# Altium PCB PCB1_test.PcbDoc
Units mil, origin at the board's own origin, x right, y up, seen from the top; angles counter-clockwise.
Board outline 5106 x 1904 mil, 2 copper layers (Top Layer, Bottom Layer); 59 components, 20 nets, 152 pads, 39 vias.
Unrouted connection lines stored in the file: 3.
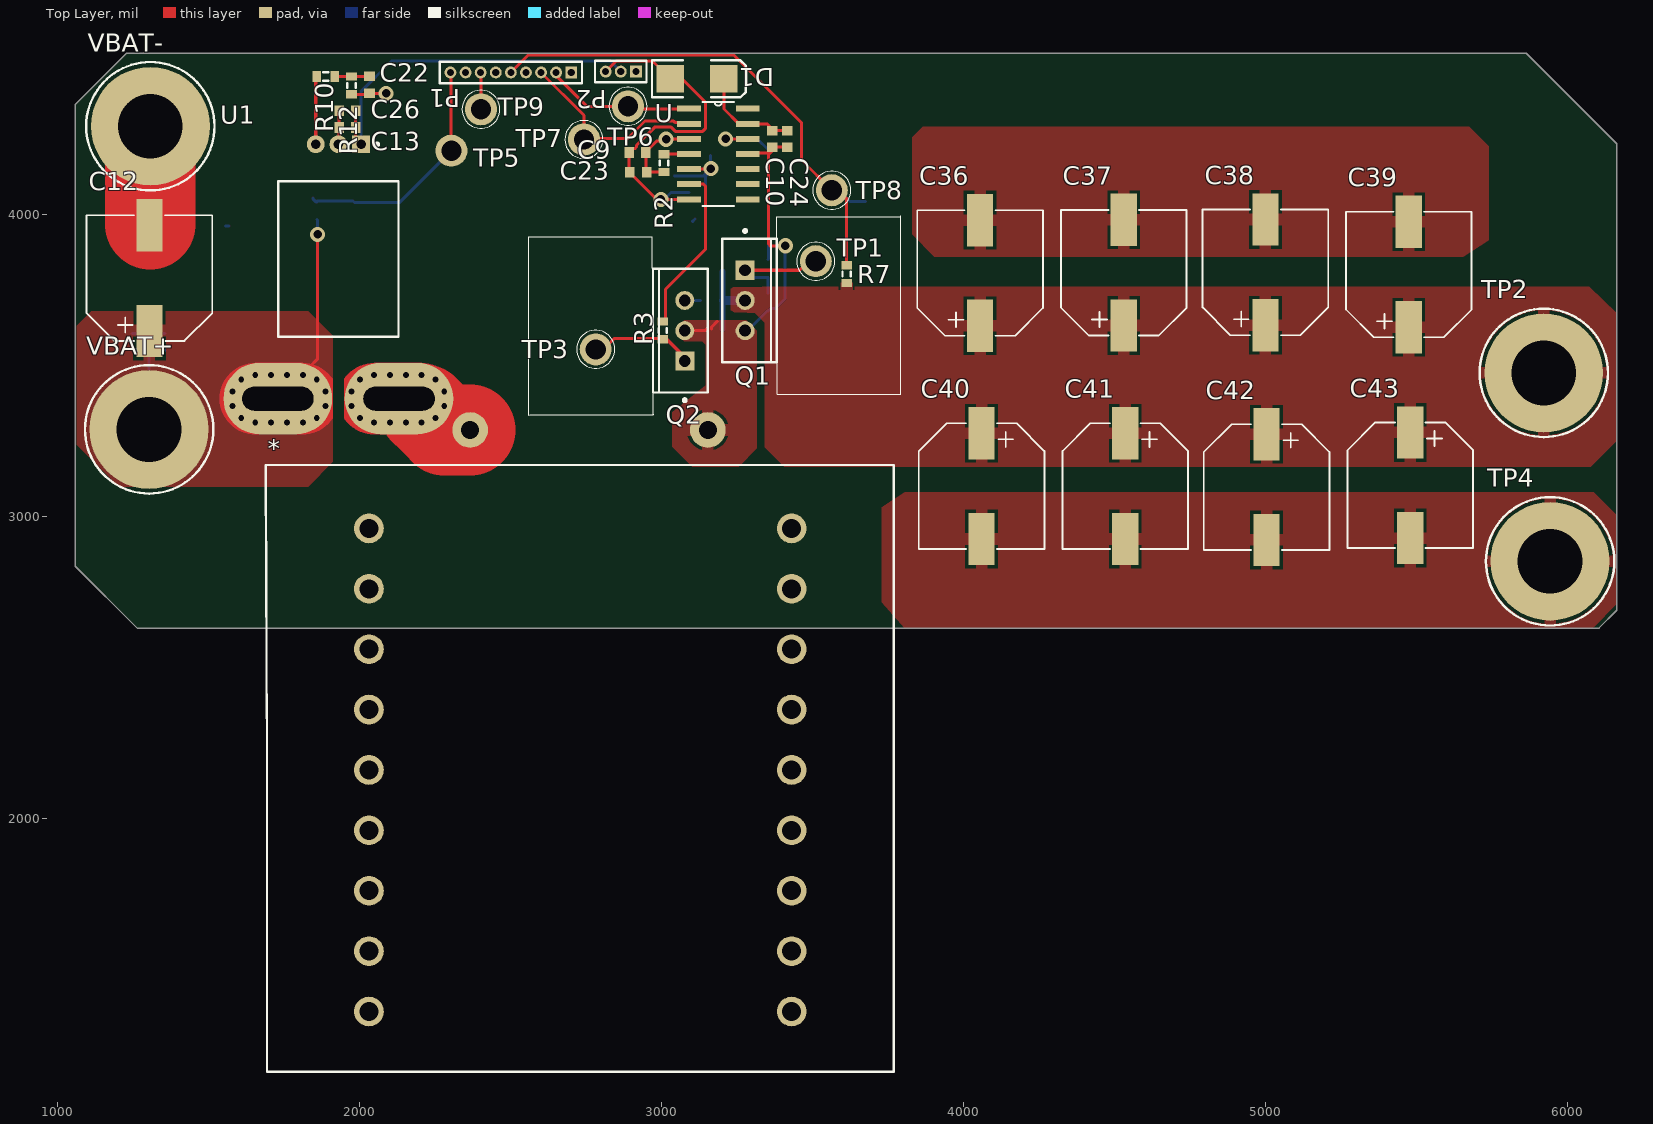
[diagram p0: Top Layer view]
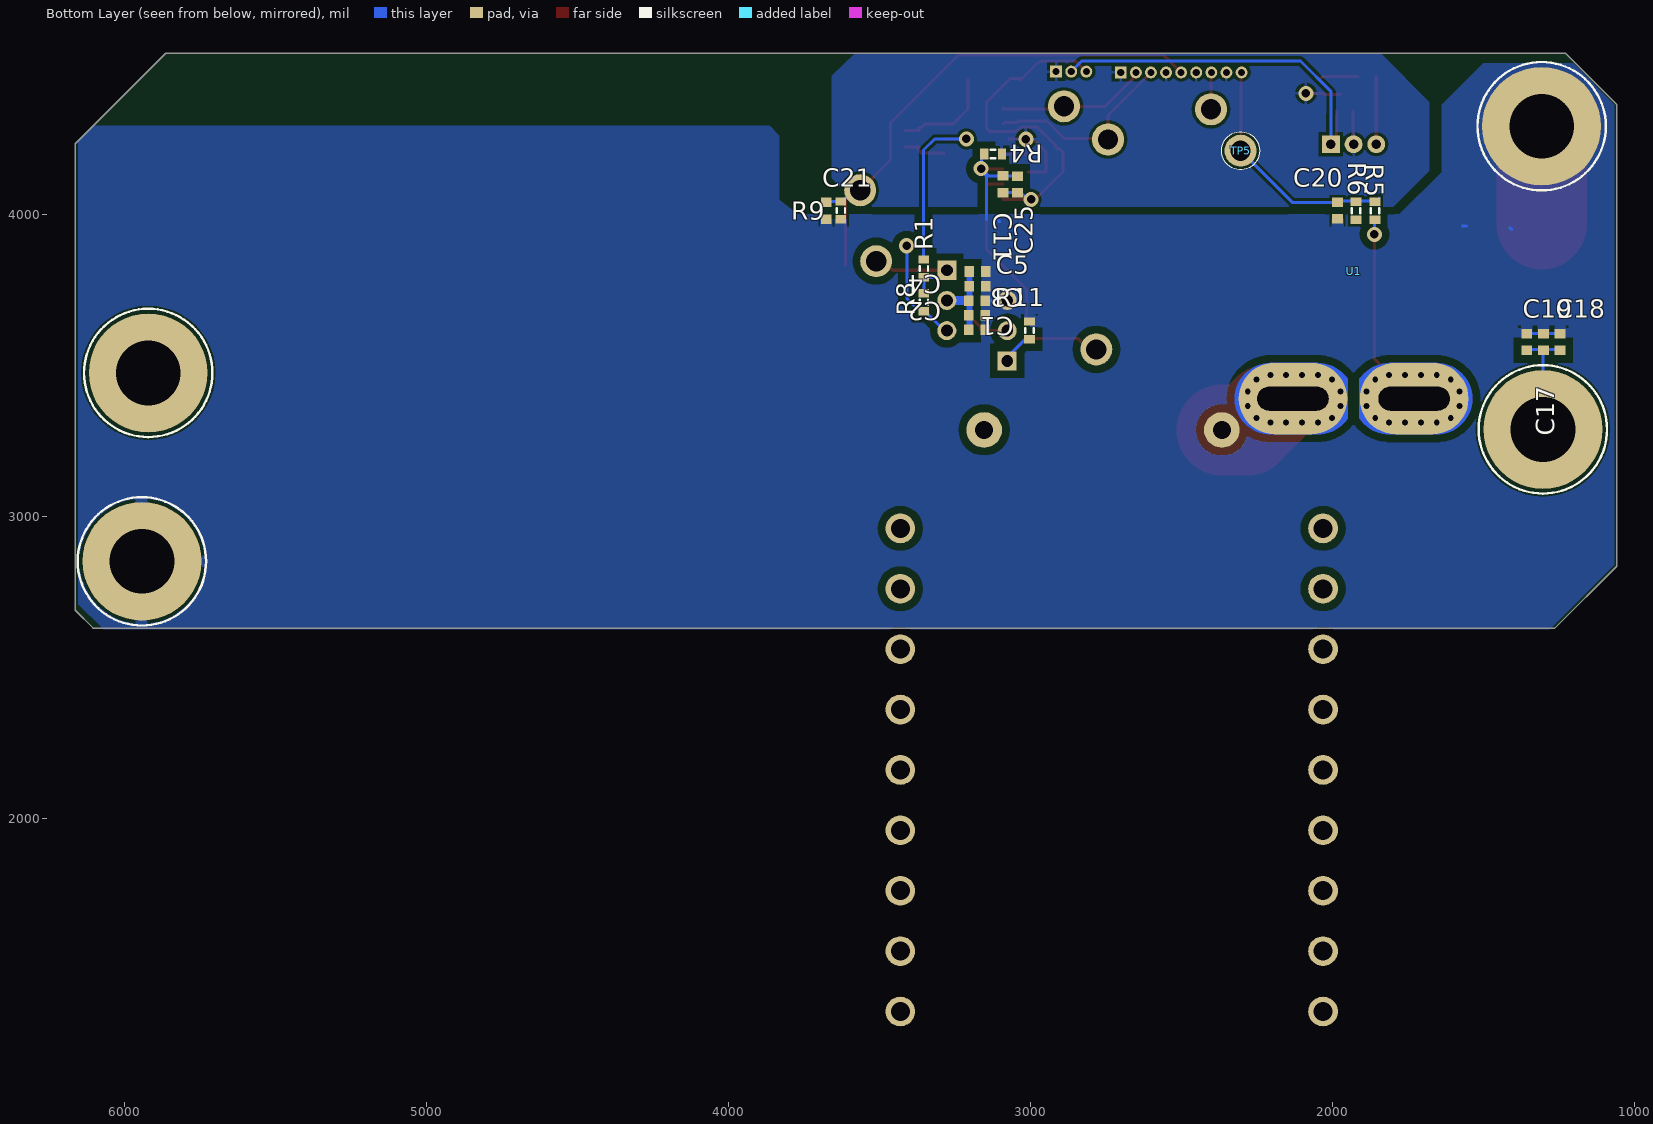
[diagram p1: Bottom Layer view, seen from below]

## Layer stack, top to bottom
Top Solder: solder mask 0.4, Solder Resist, Dk 3.5
Top Layer: signal copper 1.4
Dielectric 1: dielectric 12.6, FR-4, Dk 4.8
Bottom Layer: signal copper 1.4
Bottom Solder: solder mask 0.4, Solder Resist, Dk 3.5

## Board outline
1057,2835 1057,4364 1227,4534 5863,4534 6163,4234 6163,2689 6104,2630 1262,2630

## Design rules (kind name [scope] priority, off if disabled: settings)
Clearance [InNetClass('Boost')] p1: gap=25 ignorepadtopadclearanceinfootprint=TRUE except(0: Arc-Hole Track-Hole SMDPad-Hole THPad-Hole Via-Hole Fill-Hole Poly-Hole Region-Hole Text-Hole; 10: Text-Text)
Clearance dgndClearance [InNetClass('Control')] p2: gap=10 ignorepadtopadclearanceinfootprint=TRUE except(0: Arc-Hole Track-Hole SMDPad-Hole THPad-Hole Via-Hole Fill-Hole Poly-Hole Region-Hole Text-Hole)
Creepage [InNetClass('Boost')] p1: checkdistance=25
Height [All] p1: minheight=0 maxheight=99999 prefheight=500
PolygonConnect PolygonConnect_1 [InNetClass('Boost')] p1: connectstyle=Relief reliefconductorwidth=40 reliefentries=4 polygonreliefangle="90 Angle" airgapwidth=10
PolygonConnect [All] p2: connectstyle=Relief reliefconductorwidth=10 reliefentries=4 polygonreliefangle="90 Angle" airgapwidth=10
RoutingVias [All] p1: holewidth=28 width=50 viastyle="Through Hole" minholewidth=28 minwidth=50 maxholewidth=28 maxwidth=50
SolderMaskExpansion [All] p1: expansion=4 istentingtop=FALSE
Width [InNetClass('Boost')] p1: maxlimit=500 minlimit=10 preferedwidth=300 minimp=50.000000 maximp=50.000000 favimp=50.000000
29 further rules are at their usual default settings.

## Classes and differential pairs
component class decoupling: C1 C2 C3 C4 C5 C36 C37 C38 C39 C40 C41 C42 C43
net class Control: +5 +15 DGND G_HO G_LO HIN Isense IsenseFiltered LIN NetC10_2 NetR1_2 NetR2_2 NetR3_2 NetU_8 NetU_9 NetU_10 NetU_14 PGND Vbat VbatFiltered Vout VoutFiltered Vs
net class Boost: G_HO G_LO Net*_1 PGND Vbat Vout Vs
component class SignalFilters: C20 C21 C22 P1 R5 R6 R7 R9 R10 R12 TP5 TP6 TP7 TP8 TP9
component class Sheet1: * C9 C10 C11 C12 C13 C17 C18 C19 C23 C24 C25 C26 D1 P2 Q1 Q2 R1 R2 R3 R4 R8 R11 TP1 TP2 TP3 TP4 U U1 VBAT+ VBAT-

## Components (designator, comment, footprint, x,y, rotation, side; value= is the part's Value field where it differs from the comment)
* "ETD44_inductor" ETD44 2730,2160 r0 top
C1 "Cap" C0603 3176,3618 r0 bottom value=0.1uF
C2 "Cap" C0603 3176,3666 r0 bottom value=0.1uF
C3 "Cap" C0603 3176,3714 r0 bottom value=0.1uF
C4 "Cap" C0603 3175,3762 r0 bottom value=0.1uF
C5 "Cap" C0603 3174,3811 r0 bottom value=0.1uF
C9 "Cap" C0603 2919.56,4205 r180 top value=1uF
C10 "Cap" C0603 3366,4250 r90 top value=1uF
C11 "Cap" C0603 3090,4100 r270 bottom value=1uF
C12 "47uF" CAP_PC_10X10 1303,3789 r90 top value=Value
C13 "Cap" C0603 1958.44,4288 r0 top value=1uF
C17 "Cap" C0603 1300,3577.56 r270 bottom value=0.1uF
C18 "Cap" C0603 1245,3577.56 r270 bottom value=1uF
C19 "Cap" C0603 1355,3577.56 r270 bottom value=10uF
C20 "Cap" C0603 1982,4012.56 r90 bottom value=33nF
C21 "Cap" C0603 3675,4012 r90 bottom value=33nF
C22 "Cap" C0603 2032,4429.56 r90 top value=2.2nF
C23 "Cap" C0603 2922,4140 r0 top value=0.1uF
C24 "Cap" C0603 3415,4250 r270 top value=0.1uF
C25 "Cap" C0603 3042,4099 r90 bottom value=0.1uF
C26 "Cap" C0603 1958.44,4343 r0 top value=0.1uF
C36 "47uF" CAP_PC_10X10 4054,3806 r90 top value=Value
C37 "47uF" CAP_PC_10X10 4530,3807 r90 top value=Value
C38 "47uF" CAP_PC_10X10 4999,3808 r90 top value=Value
C39 "47uF" CAP_PC_10X10 5474,3801 r90 top value=Value
C40 "47uF" CAP_PC_10X10 4059,3100 r270 top value=Value
C41 "47uF" CAP_PC_10X10 4535,3100 r270 top value=Value
C42 "47uF" CAP_PC_10X10 5003,3097 r270 top value=Value
C43 "47uF" CAP_PC_10X10 5479,3103 r270 top value=Value
D1 "D Schottky" SMB 3117,4449 r0 top
P1 "MHDR1X9" MHDR1X9 2700,4470 r180 top
P2 "MHDR1X3" MHDR1X3 2914,4473 r180 top
Q1 "IPP076N12N3 G" INF-PG-TO220-3-1_A_V 3276,3715 r0 top
Q2 "IPP076N12N3 G" INF-PG-TO220-3-1_A_V 3076,3615 r180 top
R1 "Res3" J1-0603 3352,3821 r90 bottom value=10
R2 "Res3" J1-0603 3007,4170 r90 top value=0
R3 "Res3" J1-0603 3003,3616 r90 top value=10
R4 "Res3" J1-0603 3123,4200 r180 bottom value=0
R5 "Res3" J1-0603 1858,4012 r270 bottom value=22k
R6 "Res3" J1-0603 1921,4012 r90 bottom value=1k
R7 "Res3" J1-0603 3612,3802.53 r270 top value=22k
R8 "Res3" J1-0603 3352,3709 r90 bottom value=10k
R9 "Res3" J1-0603 3627,4013 r90 bottom value=1k
R10 "Res3" J1-0603 1887,4457 r180 top value=22k
R11 "Res3" J1-0603 3002,3616 r270 bottom value=10k
R12 "Res3" J1-0603 1972,4427 r270 top value=33k
TP1 "Test Point" "TEST POINT - TH" 3510,3845 r0 top
TP2 "575-4" KSTN-575-4 5921,3475 r0 top
TP3 "Test Point" "TEST POINT - TH" 2781,3553 r0 top
TP4 "575-4" KSTN-575-4 5942,2851 r0 top
TP5 "Test Point" "TEST POINT - TH" 2303,4211 r0 bottom
TP6 "Test Point" "TEST POINT - TH" 2888,4358 r0 top
TP7 "Test Point" "TEST POINT - TH" 2742,4248 r0 top
TP8 "Test Point" "TEST POINT - TH" 3563,4080 r90 top
TP9 "Test Point" "TEST POINT - TH" 2401,4348 r0 top
U "IR21834STRPBF" SOIC127P600X175-14N 3187,4200 r0 top
U1 "ACS770KCB-150B-PFF-T" ALLEGRO_MICROSYSTEMS_CB-PFF-5_0 1929,3811 r180 top
VBAT+ "575-4" KSTN-575-4 1302,3288 r0 top
VBAT- "575-4" KSTN-575-4 1306,4292 r0 top

## Footprints (in the part's own frame and the unit in brackets; to place one, negate y for a bottom-side part, rotate by r counter-clockwise, add the part's x,y. Pads: shape width x height; smd on the part's side, far side on the other; paste and mask are expansions set on the pad)
ALLEGRO_MICROSYSTEMS_CB-PFF-5_0 [mm]
  rect 1.5x1.5 hole 0.8 paste-1000 mask+0: 1(-1.91,-10.7)
  round 1.5 hole 0.8 paste-1000 mask+0: 2(0,-10.7) 3(1.91,-10.7)
  oval 9.144x6.02 hole 2 slot 5.994 at 0 deg paste-1000 mask+0: 4(5.099,10.7) 5(-5.099,10.7)
  round 5.4 smd far side paste-1000 mask+0: 4(5.099,10.7) 5(-5.099,10.7)
  Top Layer region: -0.5,9.042 -1.581,8.057 -3,7.7 -3,7.7 -7,7.7 -8.302,7.997 -9.345,8.83 -9.925,10.032 -9.925,11.368 -9.345,12.57 -8.302,13.403 -7,13.7 -7,13.7 -3,13.7 -1.581,13.343 -0.5,12.358 -0.5,12.358
  Top Layer region: 0.5,12.358 1.581,13.343 3,13.7 3,13.7 7,13.7 8.302,13.403 9.345,12.57 9.925,11.368 9.925,10.032 9.345,8.83 8.302,7.997 7,7.7 7,7.7 3,7.7 1.581,8.057 0.5,9.042 0.5,9.042
  Bottom Layer region: -0.5,9.042 -1.581,8.057 -3,7.7 -3,7.7 -7,7.7 -8.302,7.997 -9.345,8.83 -9.925,10.032 -9.925,11.368 -9.345,12.57 -8.302,13.403 -7,13.7 -7,13.7 -3,13.7 -1.581,13.343 -0.5,12.358 -0.5,12.358
  Bottom Layer region: 0.5,12.358 1.581,13.343 3,13.7 3,13.7 7,13.7 8.302,13.403 9.345,12.57 9.925,11.368 9.925,10.032 9.345,8.83 8.302,7.997 7,7.7 7,7.7 3,7.7 1.581,8.057 0.5,9.042 0.5,9.042
  silkscreen extent -5.05,-10.82 5.05,5.5, body extent -10.1,-11.55 10.1,13.8, height 0.25
C0603 [mm] "Chip Capacitor, Body 1.6x0.8mm, IPC High Density"
  rect 0.8x0.9 smd: 1(-0.7,0) 2(0.7,0)
  body extent -0.87,-0.48 0.87,0.48, height 1.3
CAP_PC_10X10 [mil]
  rect 173x87 smd paste+0 mask+0: 1(-175,0) 2(175,0)
  silkscreen extent -208,-208 208,208, body extent -228,-207 229,206, height 506
ETD44 [mm]
  round 3 hole 1.5: 1(-9.271,28.6) 2(10.729,28.6)
  round 2.5 hole 1.6: NC(-17.78,-20.32) NC(-17.78,-15.24) NC(-17.78,-10.16) NC(-17.78,-5.08) NC(-17.78,0) NC(-17.78,5.08) NC(-17.78,10.16) NC(-17.78,15.24) NC(-17.78,20.32) NC(17.78,-20.32) NC(17.78,-15.24) NC(17.78,-10.16) NC(17.78,-5.08) NC(17.78,0) NC(17.78,5.08) NC(17.78,10.16) NC(17.78,15.24) NC(17.78,20.32)
  Top Layer lines w0.254: -16.866,-20.396 -16.662,-20.396
  silkscreen extent -26.47,-25.4 26.37,25.65, body extent -25.5,-24.8 25.5,24.8, height 38.11
INF-PG-TO220-3-1_A_V [mm] "FM, 3-Leads, Body 10.03x8.98mm, Pitch 2.54mm"
  rect 1.6x1.6 hole 1: 1(0,2.54)
  round 1.6 hole 1: 2(0,0) 3(0,-2.54)
  silkscreen extent -1.93,-7.9 13.11,7.14, body extent -1.93,-7.85 13.03,7.03, height 23.52
J1-0603 [mm] "Chip Resistor, Body 1.6x0.8mm, IPC High Density"
  rect 0.7x0.9 smd: 1(-0.75,0) 2(0.75,0)
  silkscreen extent -0.2,-0.35 0.2,0.35, body extent -0.85,-0.48 0.85,0.48, height 0.9
KSTN-575-4 [mm] "Banana Jack, Non-Insulated, Dia 7.92mm"
  round 10 hole 5.45: 1(0,0)
  silkscreen extent -5.4,-5.4 5.4,5.4, body extent -3.98,-3.96 3.92,3.94, height 2.36
MHDR1X3 [mm] "Connector; Header; 3 Position"
  rect 1x1 hole 0.6: 1(0,0)
  round 1 hole 0.6: 2(1.27,0) 3(2.54,0)
  silkscreen extent -0.9,-0.9 3.44,0.9
MHDR1X9 [mm] "Connector; Header; 9 Position"
  rect 1x1 hole 0.6: 1(0,0)
  round 1 hole 0.6: 2(1.27,0) 3(2.54,0) 4(3.81,0) 5(5.08,0) 6(6.35,0) 7(7.62,0) 8(8.89,0) 9(10.16,0)
  silkscreen extent -0.9,-0.9 11.06,0.9
SMB [mm] "DO-214-AA/SMB; 2 C-Bend Leads; Body 5.3 x 3.6 mm, inc. leads (LxW)"
  rect 2.3x2.3 smd: 1(-2.25,0) 2(2.25,0)
  silkscreen extent -3.8,-1.55 4.1,1.55
SOIC127P600X175-14N [mil]
  rect 78x20 smd: 1(-97,150) 2(-97,100) 3(-97,50) 4(-97,0) 5(-97,-50) 6(-97,-100) 7(-97,-150) 8(97,-150) 9(97,-100) 10(97,-50) 11(97,0) 12(97,50) 13(97,100) 14(97,150)
  silkscreen extent -53,-172 53,172, body extent -121,-173 121,173, height 79
"TEST POINT - TH" [mm] "TH Test Point"
  round 2.7 hole 1.7: 1(0,0)
  silkscreen extent -1.6,-1.6 1.6,1.6

## Part data
C1 C2 C3 C4 C5 C9 C10 C11 C13 C17 C18 C19 C20 C21 C22 C23 C24 C25 C26: "Capacitor", LatestRevisionDate=17-Jul-2002, LatestRevisionNote="Re-released for DXP Platform.", PackageDescription="Radial Cap, Thru-Hole; 2 Leads; 0.3 in Pin Spacing", PackageReference=RAD-0.3, Published=8-Jun-2000, Publisher="Altium Limited"
C12 C36 C37 C38 C39 C40 C41 C42 C43: library part A767MU476M1KLAE040, "CAP ALUM POLY 47UF 20% 80V SMD", Case/Package=Radial, ESR (Equivalent Series Resistance)=40mR, Manufacturer=KEMET, Max Operating Temperature=105°C, Min Operating Temperature=-55°C, Supplier Part Number 1=399-15651-1-ND, Tolerance=20%, Voltage Rating=80V, Built_By=EMA_Cory, Capacitance=47uF, Category=Capacitors, ComponentLink1Description=https://api.kemet.com/component-edge/download/datasheet/A767MU476M1KLAE040.pdf?src-supplier=Digi-Key, ComponentLink1URL=https://api.kemet.com/component-edge/download/datasheet/A767MU476M1KLAE040.pdf?src-supplier=Digi-Key, ComponentLink2Description=SupplierDigikey, ComponentLink2URL=https://www.digikey.com/product-detail/en/kemet/A767MU476M1KLAE040/399-15651-6-ND/7392929, Copyright="Copyright (C) 2018 Accelerated Designs. All rights reserved", Life (Hours)=2000Hour, Manufacturer Part Number=A767MU476M1KLAE040, Manufacturer_Part_Number=KEMET, Mount="Surface Mount", Packaging="Tape and Reel", Pricing 1="1=3.12000, 10=2.52600, 100=1.92890 (USD)", RefDes=RefDes, RoHS=No, Stock 1=1540, Supplier 1=Digi-Key, Type=DEV, Vendor=Nichicon
D1: "Schottky Diode", Code_JEDEC=DO-214-AA, LatestRevisionDate=17-Jul-2002, LatestRevisionNote="Re-released for DXP Platform.", PackageDescription="DO-214-AA/SMB; 2 C-Bend Leads; Body 5.3 x 3.6 mm, inc. leads (LxW)", PackageReference=SMB, Published=8-Jun-2000, Publisher="Altium Limited"
P1: "Header, 9-Pin", LatestRevisionDate=17-Jul-2002, LatestRevisionNote="Re-released for DXP Platform.", Publisher="Altium Limited"
P2: "Header, 3-Pin", LatestRevisionDate=17-Jul-2002, LatestRevisionNote="Re-released for DXP Platform.", Publisher="Altium Limited"
Q1 Q2: "N-Channel OptiMOS 3 Power-Transistor, 120 V VDS, 100 A ID, -55 to 175 degC, PG-TO220-3-1, Tube, Green", Manufacturer=Infineon, Supplier Part Number 1=726-IPP076N12N3GXK, ComponentLink1Description="Manufacturer URL", ComponentLink1URL=http://www.infineon.com/, ComponentLink2Description=Datasheet, ComponentLink2URL=http://www.infineon.com/dgdl/IPP_I076N12N3+G_Rev2.3.pdf?folderId=db3a304313b8b5a60113cee8763b02d7&fileId=db3a30432239cccd0122a77a83ab7cd4, ComponentLink3Description="Package Specification", ComponentLink3URL=http://www.infineon.com/dgdl/IPP028N08N3_Rev1%5B1%5D.0.pdf?folderId=db3a304313b8b5a60113cee8763b02d7&fileId=db3a30432313ff5e0123a3c08e7326b5, DatasheetVersion="Rev. 2.3", Green=TRUE, Halogen-free=TRUE, ID (max)="100 A", IDpuls (max)="400 A", Mounting Technology="Through Hole", PackageDescription="3-Pin Plastic (Green) Transistor Single Outline Package, 10.03 x 8.98 mm Body, 2.54 mm Pitch", PackageReference=PG-TO220-3-1, PackageVersion="Rev. 05, 08/2007", Packing=Tube, PartNumber="IPP076N12N3 G", Polarity=N, Ptot (max)="188 W", QG="76 nC", RDS (on) (max)="7.6 mOhm", Rth="0.8 K/W", RthJA (max)="62 K/W", RthJC (max)="0.8 K/W", Supplier 1=Mouser, Supplier 2=Digi-Key, Supplier Part Number 2="IPP076N12N3 G-ND", VDS (max)="120 V", VGS(th) (max)="4 V", VGS(th) (min)="2 V"
R1 R2 R3 R4 R5 R6 R7 R8 R9 R10 R11 R12: "Resistor", LatestRevisionDate=29-May-2009, LatestRevisionNote="IPC-7351 Footprint Added.", PackageDescription="Chip Resistor", PackageReference=J1-0603, Published=8-Jun-2000, Publisher="Altium Limited"
TP2 TP4 VBAT+ VBAT-: library part CMP-2000-05649-1, "Banana Jack, Non-Insulated, 1-Pin THD, RoHS, Bulk", Color=-, Manufacturer=Keystone-Electronics, Package Description="1-Pin Through Hole Device, Dia 7.92 mm", Package Version="Rev. B, 11/1994", Body Material=-, Category=Connectors,Interconnects, ComponentLink1Description=SupplierDigikey, ComponentLink1URL=https://www.digikey.com/product-detail/en/keystone-electronics/575-4/36-575-4-ND/318493, Contact Finish=Nickel, Contact Material=Brass, Datasheet URL=http://www.keyelco.com/product-pdf.cfm?p=2379, Datasheet Version="Rev. B, 11/1994", Family=BananaandTipConnectors-Jacks,Plugs, Features=-, Gender=Female, Insulation=Non-Insulated, Manufacturer URL=http://www.keyelco.com/, Mounting Technology=ThroughHole, Mounting Type=ThroughHole, Operating Temperature=-, Package Reference=575-4, Package URL=http://www.keyelco.com/product-pdf.cfm?p=2379, Packaging=Bulk, Plug/Mating Plug Diameter=StandardBanana, Series=-, Termination=Solder, Type=BananaJack, Wire Gauge=-
U: "INTERNATIONAL RECTIFIER   IR21834STRPBF   MOSFET DRIVER, HALF BRIDGE, SOIC-14, FULL REEL", Case/Package=SOIC, Manufacturer="International Rectifier", Manufacturer Part Number=IR2183STRPBF, Max Operating Temperature=125°C, Max Output Current=2.3A, Max Power Dissipation=625mW, Max Supply Current=1.6mA, Max Supply Voltage=20V, Min Operating Temperature=-40°C, Min Supply Voltage=10V, Nominal Supply Current=1mA, Output Current=1.9A, Package="SOIC-14 Infineon", Package Quantity=1, Category=MOSFETs, ComponentLink1Description=SupplierDigikey, ComponentLink1URL=https://www.digikey.com/product-detail/en/infineon-technologies/IR21834STRPBF/IR21834SPBFCT-ND/827949, ComponentLink2Description=Datasheet, ComponentLink2URL=https://www.infineon.com/dgdl/ir2183.pdf?fileId=5546d462533600a4015355c9490e16d1, ComponentLink3Description="application note", ComponentLink3URL=https://www.infineon.com/dgdl/Infineon-Using_Monolithic_Voltage_Gate_Drivers-AN-v01_00-EN.pdf?fileId=5546d462584d1d4a01585242c11947b1, Digi-Key_Part_Number=IR21834SPBFCT-ND, Digi-Key_Purchase_URL=https://www.digikey.com/product-detail/en/infineon-technologies/IR21834STRPBF/IR21834SPBFCT-ND/827949?utm_source=snapeda&utm_medium=aggregator&utm_campaign=symbol, Fall Time=35ns, Height=1.5mm, Length=8.74mm, MF="Infineon Technologies", Mount="Surface Mount", MP=IR21834STRPBF, Number of Drivers=2, Number of Outputs=2, Number of Pins=8, Operating Supply Current=1.6mA, Output Voltage=20V, Packaging="Tape and Reel", Power Dissipation=625mW, Pricing 1="1=3.18000, 10=2.85300, 25=2.69760, 100=2.21800, 250=1.99016, 500=1.91824, 1000=1.59454 (USD)", Pricing 2="1=3.19000, 10=2.86600, 25=2.70960, 100=2.22780, 250=1.99896, 500=1.92672, 1000=1.60159 (USD)", Propagation Delay=330ns, Radiation Hardening=No, REACH SVHC="No SVHC", Rise Time=60ns, RoHS=Yes, SnapEDA_Link=https://www.snapeda.com/parts/IR21834STRPBF/Infineon%20Technologies/view-part/528919/?ref=snap, Stock 1=12591, Stock 2=6093, Supplier 1=Digi-Key, Supplier 2=Digi-Key, Supplier 3=Digi-Key, Supplier Part Number 3=IR21834SPBFCT-ND, Turn-Off Delay Time=220ns, Turn-On Delay Time=35ns, Weight=0.019048oz, Width=3.99mm
U1: "ALLEGRO MICROSYSTEMS - ACS770LCB-050U-PFF-T - HIGH PRECISION LINEAR CURRENT SENSOR ROHS COMPLIANT: YES", Current Sensing=50A, Frequency=120kHz, Manufacturer="Allegro MicroSystems", Manufacturer Part Number=ACS770LCB-050U-PFF-T, Max Operating Temperature=150°C, Max Supply Current=15mA, Min Operating Temperature=-40°C, Supplier Part Number 1=620-1542-5-ND, Accuracy=0.6%, Category="Current Sensors", ComponentLink1Description="Digikey Datasheet", ComponentLink1URL=https://www.allegromicro.com/~/media/Files/Datasheets/ACS770-Datasheet.pdf?src-supplier=Digi-Key, ComponentLink2Description="Newark Datasheet", ComponentLink2URL=http://www.farnell.com/datasheets/2838159.pdf?src-supplier=Newark, ComponentLink3Description=SupplierDigikey, ComponentLink3URL=https://www.digikey.com/product-detail/en/allegro-microsystems/ACS770LCB-050U-PFF-T/620-1542-5-ND/4473981, Linearity=1%, Mount="Through Hole", Number of Channels=1, Packaging=Rail/Tube, Polarity=Unidirectional, Pricing 1="1=7.18000, 5=6.30000, 10=5.67000, 25=5.04000, 50=4.66200, 100=4.03200, 500=3.78000, 1000=3.52800 (USD)", Response Time=4.6us, RoHS=No, Sensitivity=80mV/A, Stock 1=4174, Supplier 1=Digi-Key
*: ComponentLink1Description=DigikeyDistributer, ComponentLink1URL=https://www.digikey.com/product-detail/en/tdk-electronics-inc/B66366B1018T001/495-5481-ND/3914838

## Via types
v1: diameter 31.5, hole 19.68, Top Layer to Bottom Layer, 32 vias
v2: diameter 50, hole 28, Top Layer to Bottom Layer, 7 vias

## Nets (pads, with @x,y where several pads share a name; then routed paths per layer and width w, separated by ;. In a path a pad name is that pad's centre, name@x,y a point inside that pad or via, vN(x,y) a via of type N, cw(c..) or ccw(c..) an arc to the next point about the centre after c; other vN are vias at no path point)
+5: C13.2 C26.2 P2.2 U1.1 | length 1225.5
  Top Layer w10: U1.1@1986,4209.06 C13.2 C26.2
  Bottom Layer w10: U1.1 2004.2,4330.94 2003.14,4331.99 2003.14,4406.14 2104.69,4507.69 2829.31,4507.69 P2.2
+15: C9.2 C11.2 C23.1 C25.1 D1.1 P2.3 U.7 | length 1208.9
  Top Layer w10: P2.3 2848.69,4507.69 2965.31,4507.69 2970,4503 2974.42,4503 3027.42,4450 3066,4450 3144,4372 3144,4283.79 3135.21,4275 3044.79,4275 3030.79,4289 2976.44,4289 2916.37,4228.93 2916.37,4223.57 2910.51,4217.72 2902.75,4217.72 2892,4206.97 C9.2 2892,4140.47 2974.82,4057.65 2989.35,4057.65 v2(2997,4050) U.7 ; D1.1 D1.1@3033,4444.42
  Bottom Layer w10: v2@2986.18,4050 v2(2997,4050) 3007.82,4050 3030.26,4072.44 C11.2
DGND: C9.1 C13.1 C22.1 C23.2 C26.1 P1.1 P1.4 P1.6 P1.8 P2.1 R2.1 R4.2 R12.2 U1.2 U.3 | length 493
  Top Layer w10: U1.2@1930.88,4234.21 C13.1 C26.1 ; R12.2 2027.47,4397.47 C22.1 2033,4401 v2(2087,4401) ; R2.1 2950.03,4140.47 C23.2 2947.12,4142.44 C9.1 2947.12,4206.97 2982.5,4242.35 3007.35,4242.35 v2(3014,4249) U.3@3071,4249
G_HO: Q1.1 R1.1 R8.2 TP1.1 | length 401.8
  Top Layer w10: Q1.1@3259.53,3815.47 3260,3815 Q1.1 3455.99,3815 3485.99,3845 TP1.1
  Bottom Layer w10: Q1.1 3299.53,3791.47 R1.1 R8.2
G_LO: Q2.1 R3.1 R11.2 TP3.1 | length 458.6
  Top Layer w10: TP3.1 2806.43,3553 2841.91,3588.47 3011,3588.47 3014.94,3588.47 3061.5,3541.91 3061.5,3541.5 Q2.1@3088,3515
  Bottom Layer w10: R11.2@3012,3587.47 3015.94,3587.47 3024.72,3578.69 3024.72,3578.28 Q2.1@3088,3515
HIN: P1.2 TP6.1 U.1 | length 561.9
  Top Layer w10: P1.2 2655.62,4464.38 2655.62,4453.8 2751.42,4358 TP6.1 ; TP6.1@2901,4349 3089,4349 U.1 U.1@3092,4352
  Bottom Layer w10: TP6.1@2897,4309 TP6.1@2897,4388.06
Isense: R10.2 U1.3 | length 224.7
  Top Layer w10: U1.3 R10.2@1853.8,4457
IsenseFiltered: C22.2 P1.7 R10.1 R12.1 TP9.1 | length 245.6
  Top Layer w10: R10.1 1917,4456.53 R12.1 2031.41,4456.53 C22.2 C22.2@2037.12,4452 ; P1.7 2400.5,4469.5 2400.5,4348.5 TP9.1
LIN: P1.3 TP7.1 U.2 | length 639.6
  Top Layer w10: P1.3 2742,4328 TP7.1 ; TP7.1@2766,4251 2886.56,4251 2944.56,4309 3039.07,4309 3043.07,4305 3085,4305 U.2
  Bottom Layer w10: TP7.1@2737,4253 TP7.1
Net*_1: *.1 U1.5 | length 178.7
  Top Layer w300: U1.5@2213.76,3352.24 2240.03,3325.97 2280,3286 *.1
  other v1: 2047.11,3311 2099.6,3311 2152.1,3311 2204.59,3311 2000.81,3326.04 2250.89,3326.04 1972.23,3365.41 2279.47,3365.41 1972.23,3414.07 2279.47,3414.07 2000.81,3453.44 2250.89,3453.44 2047.11,3468.48 2099.6,3468.48 2152.1,3468.48 2204.59,3468.48
NetC10_2: C10.2 C24.1 D1.2 U.13 | length 339.1
  Top Layer w10: D1.2 3205.58,4349.42 3255,4300 U.13 3348.23,4300 3359.92,4288.31 C10.2@3369.25,4288.31 ; C10.2 C10.2@3380,4277.56 ; C10.2@3378.95,4278.61 C10.2@3380,4277.56 ; C24.1 C10.2@3380,4277.56
NetR1_2: R1.2 U.12 | length 593.2
  Top Layer w10: v2(3211,4250) U.12
  Bottom Layer w10: v2(3211,4250) 3316,4250 3353,4213 3353,3851.53 R1.2
NetR2_2: R2.2 U.4 | length 83.2
  Top Layer w10: R2.2 3007.24,4199.76 3089.76,4199.76 U.4
NetR3_2: R3.2 U.6 | length 558.1
  Top Layer w10: R3.2@3011,3647.53 3012,3648.53 3012,3752 3144,3884 3144,4094.14 3138.14,4100 U.6
PGND: C1.1 C2.1 C3.1 C4.1 C5.1 C11.1 C12.2 C17.1 C18.1 C19.1 C20.1 C21.1 C25.2 C36.2 C37.2 C38.2 C39.2 C40.2 C41.2 C42.2 C43.2 Q2.3 R4.1 R6.1 R9.1 R11.1 TP4.1 U.5 VBAT-.1 | length 936.4
  Top Layer w10: C12.2 C12.2@1306,3967 ; U.5 3090.87,4150.87 3161.76,4150.87 v2(3162.63,4151.75)
  Top Layer w300: C12.2@1306,3967 VBAT-.1
  Bottom Layer w10: C18.1 C17.1 C19.1 ; 1405,3950 1410,3955 ; 1555,3961.85 1566.81,3961.85 ; C25.2 3043,4127.56 C11.1 3138.44,4127.56 v2@3162,4151.12 ; Q2.3@3088,3715 3127.47,3715 ; 3101,3976 3110,3985 ; 3145,3982.9 3145,4125.89 3162.63,4143.52 v2(3162.63,4151.75) v2@3162,4151.12 ; v2@3162,4150 v2@3162,4151.12 ; R4.1@3162,4195.47 v2@3162,4151.12
Vbat: C12.1 C17.2 C18.2 C19.2 R5.2 U1.4 VBAT+.1 | length 1069.4
  Top Layer w10: U1.4@1728.24,3389.74 1728.31,3389.74 U1.4@1833.17,3494.6 ; U1.4@1808.97,3470.4 U1.4@1833.17,3494.6 ; v2(1860,3934) 1860,3521.5 1833.17,3494.67 U1.4@1833.17,3494.6
  Bottom Layer w10: C18.2 1248,3553 1297,3553 C17.2 ; VBAT+.1 1302,3548 C17.2 ; C19.2 1352,3553 1303,3553 C17.2 ; U1.4@1728.24,3389.74 U1.4@1737.46,3389.74 ; R5.2 1860,3980.47 v2(1860,3934)
  other v1: 1653.41,3311 1705.9,3311 1758.4,3311 1810.89,3311 1607.11,3326.04 1857.19,3326.04 1578.53,3365.41 1885.77,3365.41 1578.53,3414.07 1885.77,3414.07 1607.11,3453.44 1857.19,3453.44 1653.41,3468.48 1705.9,3468.48 1758.4,3468.48 1810.89,3468.48
VbatFiltered: C20.2 P1.9 R5.1 R6.2 TP5.1 | length 788
  Top Layer w10: P1.9 2301.5,4468.5 2301.5,4212.5 TP5.1
  Bottom Layer w10: R5.1@1845.28,4054.24 1845.28,4050.31 1854.06,4041.53 R5.1 ; R5.1@1858,4044.53 R6.2@1922,4044.53 ; R6.2@1925.94,4044.53 C20.2@1977.59,4044.53 ; C20.2 2132.12,4040.12 TP5.1
Vout: C1.2 C2.2 C3.2 C4.2 C5.2 C36.1 C37.1 C38.1 C39.1 C40.1 C41.1 C42.1 C43.1 Q1.2 R7.2 TP2.1 | length 266.7
  Bottom Layer w10: C1.2@3201.56,3620 C1.2 ; C3.2 C3.2@3204.56,3715
  Bottom Layer w20: C1.2@3201.56,3620 C5.2
  Bottom Layer w30: C3.2@3204.56,3715 Q1.2
VoutFiltered: C21.2 P1.5 R7.1 R9.2 TP8.1 | length 1807.8
  Top Layer w10: P1.5 2557.69,4527.69 3238.66,4527.69 3462.72,4303.63 3462.72,4180.28 TP8.1 ; TP8.1@3567,4099 3612,4054 R7.1 ; TP8.1@3581,4080 TP8.1@3596,4065
  Bottom Layer w10: TP8.1@3542,4099 3566.59,4099 3623.06,4042.53 R9.2 C21.2@3675,4042.53
Vs: *.2 C10.1 C24.2 Q1.3 Q2.2 R8.1 U.11 | length 980.9
  Top Layer w10: Q2.2@3089,3615 3144.14,3615 3150,3620.86 ; 3165,3620 3165,3626.86 3184,3645.86 ; U.11 3286.59,4202.59 3358.18,4202.59 ; C10.1 C10.1@3378.03,4222.44 ; v2(3409,3896) 3358.86,3896 3353,3901.86 3353,4197.41 3358.18,4202.59 ; C24.2 C10.1@3378.03,4222.44 ; 3358.18,4202.59 C10.1@3378.03,4222.44
  Bottom Layer w10: Q1.3 3283.59,3615 3348.06,3679.47 R8.1 3360.78,3688.25 3375.65,3688.25 3408,3720.6 v2@3408,3915
pads on no net: *.NC U.8 U.9 U.10 U.14

## Polygon pours and split planes (outlines as drawn)
Vbat on Top Layer "VBAT_L01_P013" (solid, pour order 13): 1828.85,3098 1909.32,3181.18 1909.32,3598.53 1828.85,3679 1110,3679 1063,3632 1063,3237 1202,3098
Vout on Top Layer "VOUT_L01_P002" (solid, pour order 2): 6163,3673.3 6072,3760 3240,3760 3228,3754 3228,3683 3240,3675 3307,3675 3341,3641 3341,3229 3405,3165 6077,3165 6163,3251
PGND on Top Layer "PGND_L01_P009" (solid, pour order 9): 5799,3080 3804,3080 3729,3030 3729,2715 3804,2630 6083,2630 6163,2710 6163,3003 6086,3080
PGND on Top Layer "PGND_L01_P007" (solid, pour order 7): 5739,4225 5674,4290 3864,4290 3829,4255 3829,3934 3903,3860 5654,3860 5739,3915
Vs on Top Layer "VS_L01_P000" (solid, pour order 0): 3134,3580 3145,3569 3145,3568 3145,3434.69 3034,3344.5 3034,3231 3100,3165 3254,3165 3315,3226 3315,3615 3280,3650 3075,3650 3055,3630 3055,3600 3075,3580
no net on Top Layer "NONET_L01_P008" (solid, pour order 8): 6615,1940
no net on Top Layer "NONET_L01_P006" (solid, pour order 6): 3085,3130
no net on Top Layer "NONET_L01_P004" (solid, pour order 4): 1145,3540
DGND on Bottom Layer "DGND_L02_P012" (solid, pour order 12): 3657,4451 3657,4460 3581,4532 1838,4532 1678,4372 1678,4145 1797,4025 3562,4025 3654,4117 3657,4121
PGND on Bottom Layer "PGND_L02_P011" (solid, pour order 11): 3831,4048.92 3831,4261 3863,4293 6101.61,4293 6152,4244.87 6152,2709 6069,2626 1279,2626 1065,2840 1065,3630 1065,4363 1202,4500 1500,4500 1637,4363 1637,4140 1777,4000 3770,4000

## Silkscreen, mask and mechanical layers (free items; w line width, h text height)
Mechanical 1:
  lines w10: 1057,2835 1057,4364 1227,4534 1833,4534 5863,4534 6163,4234 6163,2689 6104,2630 1262,2630 1057,2835